# Altium PCB PCB1.PcbDoc
Units mil, origin at the board's own origin, x right, y up, seen from the top; angles counter-clockwise.
Board outline 5130 x 2720 mil, 2 copper layers (Top Layer, Bottom Layer); 35 components, 31 nets, 144 pads, 0 vias.
Unrouted connection lines stored in the file: 11.
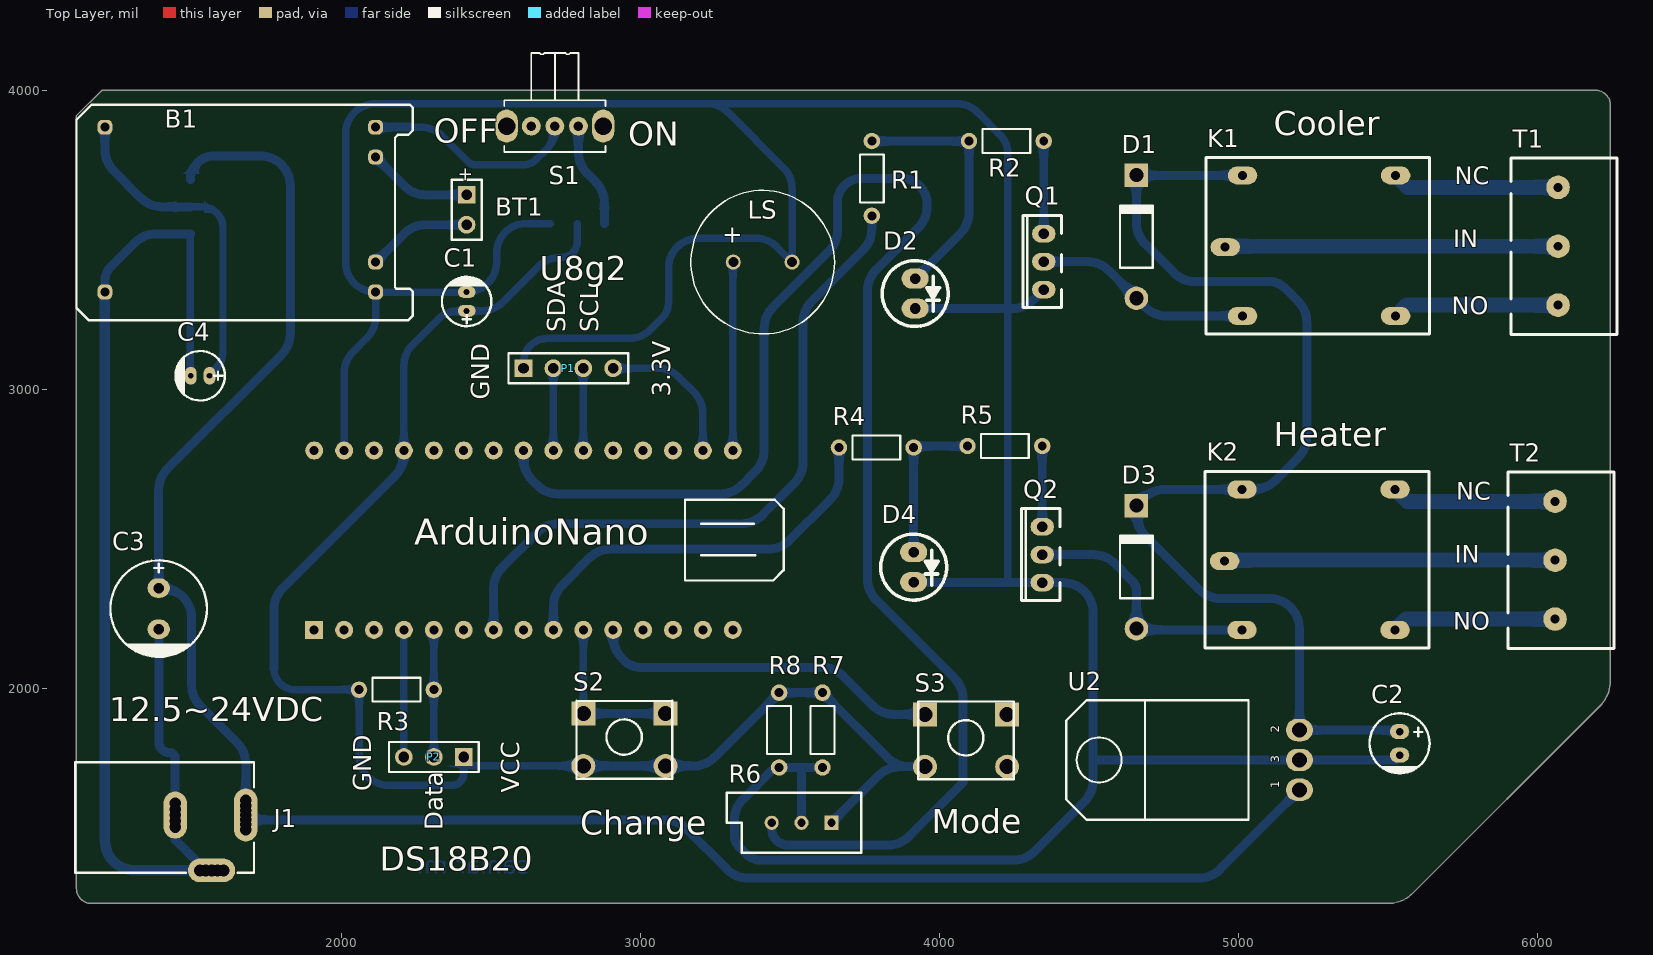
[diagram p0: Top Layer view]
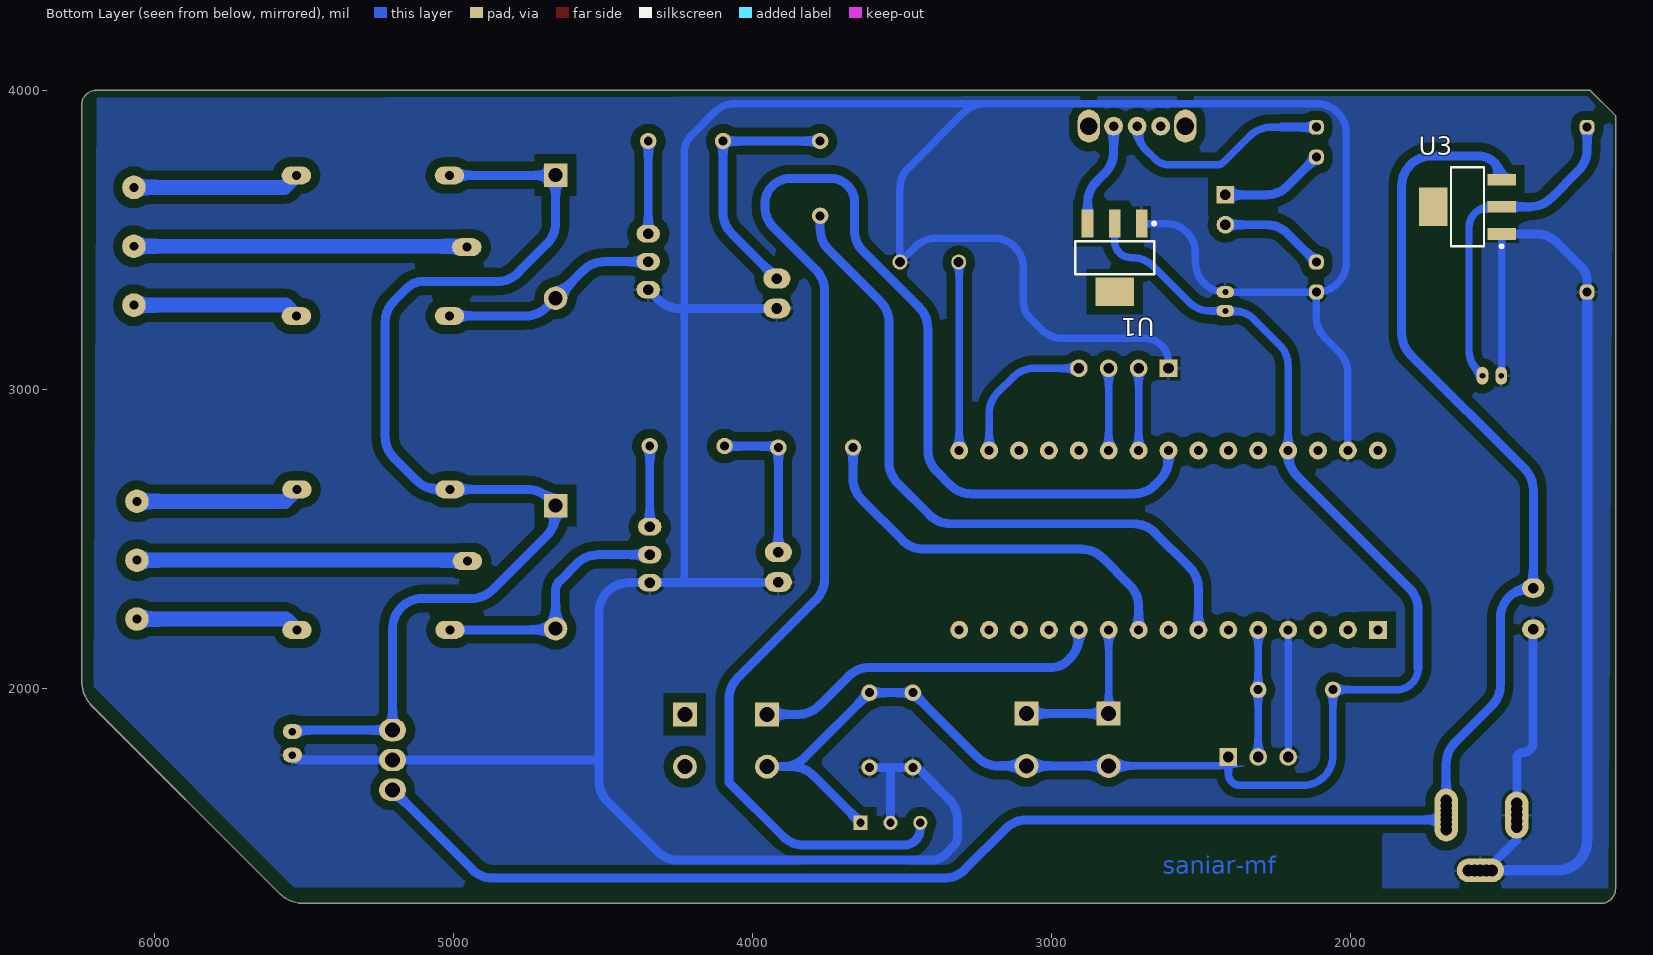
[diagram p1: Bottom Layer view, seen from below]

## Layer stack, top to bottom
Top Solder: solder mask 0.4, Solder Resist, Dk 3.5
Top Layer: signal copper 1.4
Dielectric 1: dielectric 12.6, FR-4, Dk 4.8
Bottom Layer: signal copper 1.4
Bottom Solder: solder mask 0.4, Solder Resist, Dk 3.5

## Board outline
1165,1280 cw(c1165,1330) 1115,1330 1115,3915 1200,4000 6195,4000 cw(c6195,3950) 6245,3950 6245,2025 cw(c6124.29,2025) 6209.64,1939.64 5585.36,1315.36 cw(c5500,1400.71) 5500,1280

## Design rules (kind name [scope] priority, off if disabled: settings)
Clearance Clearance_1 [InNamedPolygon('GND_L02_P025')] p1: gap=30 ignorepadtopadclearanceinfootprint=FALSE
Clearance [All] p2: gap=20 ignorepadtopadclearanceinfootprint=FALSE
DiffPairsRouting [All] p1: maxlimit=100 minlimit=30 mostfreqgap=10 toplayer_minwidth=15 toplayer_maxwidth=50 toplayer_prefwidth=15 bottomlayer_minwidth=15 bottomlayer_maxwidth=50 bottomlayer_prefwidth=15 maxuncoupledlength=500
PasteMaskExpansion [All] p1: expansion=1
PlaneClearance [All] p1: clearance=100
PlaneConnect [All] p1: planeconnectstyle=Relief reliefexpansion=20 reliefentries=4 reliefconductorwidth=10 reliefairgap=150
PolygonConnect [All] p1: connectstyle=Relief reliefconductorwidth=10 reliefentries=4 polygonreliefangle="90 Angle" airgapwidth=10
RoutingCorners [All] p1: cornerstyle=45-Degree minsetback=10 maxsetback=100
RoutingVias [All] p1: holewidth=28 width=50 viastyle="Through Hole" minholewidth=4 minwidth=8 maxholewidth=100 maxwidth=200
SMDToCorner [All] p1: distance=0
SMDToPlane [All] p1: distance=0
SolderMaskExpansion [All] p1: expansion=5
UnConnectedPin [All] p1:
UnRoutedNet [All] p1: checkbadconnections=TRUE
UnpouredPolygon [All] p1: allowunpoured=TRUE allowshelved=TRUE
Width [All] p1: maxlimit=100 minlimit=4 preferedwidth=10
23 further rules are at their usual default settings.

## Classes and differential pairs
polygon class PolygonClass_1: "Top Layer-gnd"
component class chematic: B1 BT1 C1 C2 C3 C4 D1 D2 D3 D4 J1 K1 K2 LS P1 P2 Q1 Q2 R1 R2 R3 R4 R5 R6 R7 R8 S1 S2 S3 T1 T2 U1 U3

## Components (designator, comment, footprint, x,y, rotation, side; value= is the part's Value field where it differs from the comment)
ArduinoNano "arduinoNano" "My Arduino nano" 1750,2135 r0 top (schematic designator "Arduino Nano")
B1 "TP4056" TP4056 1210,3876.18 r0 top
BT1 "Battery" BAT-2 2420,3600 r270 top
C1 "10uf" "cap 00" 2420,3293.5 r270 top value=10uF
C2 "47uf" "cap 01" 5540,1815.63 r90 top value=47uF
C3 "220uf" "cap 03" 1390,2266.1 r90 top value=220uF
C4 "22uf" "cap 00" 1528.5,3045 r0 top value=22uF
D1 "Diode 1N4007" DO-41 4660,3510 r90 top
D2 "CoLED" LED_5MM 3920,3370 r90 top
D3 "Diode 1N4007" DO-41 4660,2405 r90 top
D4 "CoLED" LED_5MM 3915,2455 r90 top
J1 "Power Jack" "Power Jack" 1110.35,1575.63 r0 top
K1 "Relay-12vDC" Relays 4891.89,3775 r270 top
K2 "Relay-12vDC" Relays 4890,2725 r270 top
LS "Buzzer" XDCR_PS1240P02BT 3410,3425 r0 top
P1 "LCD" HDR1X4 2610,3070 r0 top
P2 "DS18B20" HDR1X3 2410,1770 r180 top
Q1 "BD139" SOT-32 4409.06,3273.94 r90 top
Q2 "BD139" SOT-32 4404.06,2293.94 r90 top
R1 "180R" Res-(1/4) 3775,3705 r90 top value=180
R2 "1K" Res-(1/4) 4225,3830 r0 top
R3 "4.7K" Res-(1/4) 2185,1995 r0 top
R4 "180R" Res-(1/4) 3790,2805 r0 top value=180
R5 "1K" Res-(1/4) 4220,2810 r0 top
R6 "RPot" VR5 3540,1550 r180 top value=1K
R7 "10K" Res-(1/4) 3610,1860 r270 top
R8 "10K" Res-(1/4) 3465,1860 r270 top
S1 "Switch SPDT_Subminiator" "SPDT Subminiator" 2715,3880 r0 top
S2 "Change" "Switch - Push to On" 2947.5,1827.5 r0 top
S3 "Mode" "Switch - Push to On" 4090,1825 r0 top
T1 "Terminal" "Terminal 1*3" 5912.52,3773.43 r270 top
T2 "Terminal" "Terminal 1*3" 5902.52,2723.43 r270 top
U1 "LM1117IMP-3.3" MP04A_N 2790,3440 r270 bottom
U2 "L7812CV" "78XXCV - Right" 5205,1760 r90 top
U3 "LM1117IMP-5.0" MP04A_N 1610,3610 r0 bottom

## Footprints (in the part's own frame and the unit in brackets; to place one, negate y for a bottom-side part, rotate by r counter-clockwise, add the part's x,y. Pads: shape width x height; smd on the part's side, far side on the other; paste and mask are expansions set on the pad)
"78XXCV - Right" [mil] "Right Angle"
  oval 75x90 hole 50: 1(-100,0) 2(100,0) 3(0,0)
  silkscreen extent -201,170 200,780, body extent -198,-8 202,776, height 175
BAT-2 [mm] "Battery; 2 Leads"
  rect 1.5x1.5 hole 0.9: 1(-1.27,0)
  round 1.5 hole 0.9: 2(1.27,0)
  silkscreen extent -2.54,-1.27 2.54,1.27
"cap 00" [mm]
  oval 1x1.5 hole 0.5: 1(0.8,0) 2(-0.8,0)
  silkscreen extent -2.1,-2.1 2.1,2.1
"cap 01" [mil]
  oval 50x65 hole 25: 1(39.37,0) 2(-39.37,0)
  silkscreen extent -100,-100 100,100, body extent -99,-99 99,99, height 494
"cap 03" [mil]
  oval 65x75 hole 35: 1(68.9,0) 2(-68.9,0)
  silkscreen extent -161,-161 161,161, body extent -159,-159 157,158, height 473
DO-41 [mm] "Diode, Axial; Body 5.2 x 2.7 mm (LxDia. max), Lead Dia. 0.86 mm (max)"
  round 2 hole 1.2: 1(-5.23,0)
  rect 2x2 hole 1.2: 2(5.23,0)
  silkscreen extent -2.65,-1.4 2.75,1.4
HDR1X3 [mm] "Connector; Header; 3 Position"
  rect 1.5x1.5 hole 0.9: 1(0,0)
  round 1.5 hole 0.9: 2(2.54,0) 3(5.08,0)
  silkscreen extent -1.27,-1.27 6.35,1.27
HDR1X4 [mm] "Connector; Header; 4 Position"
  rect 1.5x1.5 hole 0.9: 1(0,0)
  round 1.5 hole 0.9: 2(2.54,0) 3(5.08,0) 4(7.62,0)
  silkscreen extent -1.27,-1.27 8.89,1.27
LED_5MM [mm]
  oval 1.7x2.3 hole 0.9: 1(0,0) 2(-2.54,0)
  silkscreen extent -4.07,-2.8 1.53,2.8
MP04A_N [mm] "SOT223, 4-Leads, Body 6.5x3.5mm, Pitch 2.3mm, Lead Span 7mm, IPC Medium Density"
  rect 2.4x1 smd: 1(-2.9,2.3) 2(-2.9,0) 3(-2.9,-2.3)
  rect 2.4x3.3 smd: 4(2.9,0)
  silkscreen extent -3.02,-3.35 1.4,3.47, body extent -3.49,-3.24 3.49,3.24, height 1.64
"My Arduino nano" [mil] "arduino nano"
  rect 60x60 hole 30: 0(160,60)
  round 60 hole 30: 1(260,60) 2(360,60) 3(460,60) 4(560,60) 5(660,60) 6(760,60) 7(860,60) 8(960,60) 9(1060,60) 10(1160,60) 11(1260,60) 12(1360,60) 13(1460,60) 14(1560,60) 15(1560,660) 16(1460,660) 17(1360,660) 18(1260,660) 19(1160,660) 20(1060,660) 21(960,660) 22(860,660) 23(760,660) 24(660,660) 25(560,660) 26(460,660) 27(360,660) 28(260,660) 29(160,660)
"Power Jack" [mm] "Power Adaptor Jack"
  round 1.5 hole 1: 1(14.5,-1.25) 1(14.5,-0.8) 1(14.5,-0.4) 1(14.5,0.4) 1(14.5,0.8) 1(14.5,1.25) 2(8.5,-1) 2(8.5,1) 2(8.5,-0.5) 2(8.5,0.5) 3(10.6,-4.7) 3(11.1,-4.7) 3(12.1,-4.7) 3(12.6,-4.7)
  oval 2x4.5 hole 1: 1(14.5,0)
  oval 2x4 hole 1: 2(8.5,0)
  oval 4x2 hole 1: 3(11.6,-4.7)
  round 1.9 on Top Overlay: MH(4,0)
  silkscreen extent 0,-4.9 15.2,4.5, body extent 0,-4.9 15.2,4.5, height 11
Relays [mil]
  oval 60x98.43 hole 30: 1(300,65) 2(60,635) 3(530,635) 4(60,123.11) 5(530,123.11)
  silkscreen extent 0,0 591,748
Res-(1/4) [mil]
  round 55 hole 30: 1(-125,0) 2(125,0)
  silkscreen extent -80,-40 80,40, body extent -135,-36 135,36, height 115
SOT-32 [mm]
  oval 1.5x2 hole 0.9: B(6.25,1.5) C(3.875,1.5) E(1.5,1.5)
  silkscreen extent 0,0 7.8,3.25
"SPDT Subminiator" [mm] "Subminiator SPDT switch"
  round 1.6 hole 0.8: 1(2,0) 2(0,0) 3(-2,0)
  oval 1.9x2.8 hole 1.5: M2(-4.1,0) M2(4.1,0)
  silkscreen extent -4.3,-2.2 4.3,6.2, body extent -4.31,-2.28 4.3,6.09, height 4.7
"Switch - Push to On" [mil]
  rect 80x80 hole 50: 1(-137.5,87.5) 1(137.5,87.5)
  round 80 hole 50: 2(-137.5,-87.5) 2(137.5,-87.5)
  silkscreen extent -160,-130 160,130, body extent -155,-121 157,123, height 205
"Terminal 1*3" [mm]
  round 2 hole 0.762: 1(2.5,4) 2(7.5,4) 3(12.5,4)
  silkscreen extent 0,0 15,9
TP4056 [mm]
  rrect70% 1.27x1.27 hole 0.762 mask+0.2: 1(0,0) 2(0,-14) 3(23,0) 4(23,-2.54) 5(23,-11.46) 6(23,-14)
  silkscreen extent -2.41,-16.38 26.16,1.91
VR5 [mm] "Thru-Hole; 3 Leads"
  rect 1.2x1.2 hole 0.7: 1(-2.54,0)
  round 1.2 hole 0.7: 2(0,0) 3(2.54,0)
  silkscreen extent -5.08,-2.54 6.35,2.54
XDCR_PS1240P02BT [mm]
  round 1.28 hole 0.85: 1(-2.5,0) 2(2.5,0)
  silkscreen extent -6.1,-6.1 6.1,6.1

## Part data
B1: "li ion charger board"
BT1: "Multicell Battery", LatestRevisionDate=17-Jul-2002, LatestRevisionNote="Re-released for DXP Platform.", PackageDescription="Battery; 2 Leads", PackageReference=BAT-2, Published=24-Mar-1999, Publisher="Altium Limited"
C1 C2 C4: library part Cap-Polar, "Polar Capacitor", Voltage=16V, Adding Date=1387/12/20, Designer="Saeid Jorablo", Organazation=ControTec
C3: library part Cap-Polar, "Polar Capacitor", Voltage=25V, Adding Date=1387/12/20, Designer="Saeid Jorablo", Organazation=ControTec
D1 D3: "1 Amp General Purpose Rectifier", Code_JEDEC=DO-204-AL, ComponentLink1Description="Manufacturer Link", ComponentLink1URL=http://www.fairchildsemi.com/, ComponentLink2Description=Datasheet, ComponentLink2URL=http://www.fairchildsemi.com/ds/1N%2F1N4001.pdf, DatasheetVersion=1998, LatestRevisionDate=17-Jul-2002, LatestRevisionNote="Re-released for DXP Platform.", PackageDescription="Diode, Axial; Body 5.2 x 2.7 mm (LxDia. max), Lead Dia. 0.86 mm (max)", PackageReference=DO-41, PackageVersion=Aug-1999, Published=8-Jun-2000, Publisher="Altium Limited"
D2 D4: library part LED, "Blue LED for Cooler"
K1: library part Relay-05vDC, "Cooler Relay", ComponentLinkURL=www.picpars.com, Designer="Seyed Mohsen Ghasemain"
K2: library part Relay-05vDC, "Heater Relay", ComponentLinkURL=www.picpars.com, Designer="Seyed Mohsen Ghasemain"
LS: library part PS1240P02BT, "Buzzers Transducer, Externally Driven Piezo 3V 4kHz 60dB @ 3V, 10cm Through Hole PC Pins", Package="2020 TDK", Availability=Unavailable, MF=TDK, MP=PS1240P02BT, Price=None, SnapEDA_Link=https://www.snapeda.com/parts/PS1240P02BT/TDK/view-part/53420/?ref=snap
P1: library part "Header 4", "I2C Oled", LatestRevisionDate=17-Jul-2002, LatestRevisionNote="Re-released for DXP Platform.", Publisher="Altium Limited"
P2: library part "Header 3", "Header, 3-Pin", LatestRevisionDate=17-Jul-2002, LatestRevisionNote="Re-released for DXP Platform.", Publisher="Altium Limited"
Q1 Q2: "NPN Transistor", De="Seyed Mohsen Ghasemian", E-mail=picpars@gmail.com, web=www.picpars.com
R1 R2 R3 R4 R5 R7 R8: library part Resistor, "Resistor", Power="1/8 W", Tolerance=5%
R6: "Potentiometer", LatestRevisionDate=17-Jul-2002, LatestRevisionNote="Re-released for DXP Platform.", PackageDescription="Variable Resistor, Thru-Hole; 3 Leads", PackageReference=VR5, Published=8-Jun-2000, Publisher="Altium Limited", Set Position=0.5, Sim Note="Enter the Resistance value and the set point into parameter fields."
S1: "Subminiator SPDT Switch", Company=E.P.I.L, Design date=2011/11/02
S2 S3: library part "Switch PB", "Push Button Switch"
T1: library part "Terminal 1*3", "Cooler Terminal", ComponentLinkURL=www.picpars.com, Designer="Seyed Mohsen Ghasemain", E-mail=picpars@gmail.com
T2: library part "Terminal 1*3", "Heater Terminal", ComponentLinkURL=www.picpars.com, Designer="Seyed Mohsen Ghasemain", E-mail=picpars@gmail.com
U1: library part LM1117IMP-x.x, "x.x Volt, 800mA Low-Dropout Linear Regulator, 4-pin SOT-223", Manufacturer="National Semiconductor", PackageTopMarking=XYTT*N05B, PowerWise=N, Supplier Part Number 1=7614123, Code_IPC=SOT223-4, Code_JEDEC=TO-261-AA, ComponentLink1Description="LM1117 Datasheet", ComponentLink1URL=http://www.national.com/ds/LM/LM1117.pdf, ComponentLink2Description="LM1117 Web Page", ComponentLink2URL=http://www.national.com/pf/LM/LM1117.html, ComponentLink3Description="MP04A Package Page", ComponentLink3URL=http://www.national.com/packaging/folders/mp04a.html, CompType="LDO IC", DatasheetVersion=Apr-2006, PackageDescription="Molded SOT-223, 6.50 x 3.56 x 1.6mm Body, 4 Lead, 2.3mm Pitch", PackageReference=MP04A, PackageVersion="revB, Apr-2003", PartNumber=LM1117IMP-3.3, PinCount=4, Published=4-Dec-2008, Publisher="Altium Limited", RoHS=N, Supplier 1=Farnell
U2: library part L78XXCV, "Fixed Voltage Regulator", Voltage=12, Adding Date=1387/01/06, Company=ControTec, Designer="Saeid Jorablo"
U3: library part LM1117IMP-x.x, "x.x Volt, 800mA Low-Dropout Linear Regulator, 4-pin SOT-223", Manufacturer="National Semiconductor", PackageTopMarking=XYTT*N05B, PartNumber=LM1117IMP-3.3, PowerWise=N, Supplier Part Number 1=7614123, Code_IPC=SOT223-4, Code_JEDEC=TO-261-AA, ComponentLink1Description="LM1117 Datasheet", ComponentLink1URL=http://www.national.com/ds/LM/LM1117.pdf, ComponentLink2Description="LM1117 Web Page", ComponentLink2URL=http://www.national.com/pf/LM/LM1117.html, ComponentLink3Description="MP04A Package Page", ComponentLink3URL=http://www.national.com/packaging/folders/mp04a.html, CompType="LDO IC", DatasheetVersion=Apr-2006, PackageDescription="Molded SOT-223, 6.50 x 3.56 x 1.6mm Body, 4 Lead, 2.3mm Pitch", PackageReference=MP04A, PackageVersion="revB, Apr-2003", PinCount=4, Published=4-Dec-2008, Publisher="Altium Limited", RoHS=N, Supplier 1=Farnell
J1: Adding Date=10/21/2009, Company=Personal, Designer="Saeid Jorablo", Project Name=Laser

## Nets (pads, with @x,y where several pads share a name; then routed paths per layer and width w, separated by ;. In a path a pad name is that pad's centre, name@x,y a point inside that pad or via, vN(x,y) a via of type N, cw(c..) or ccw(c..) an arc to the next point about the centre after c; other vN are vias at no path point)
+5: B1.1 C4.1 U3.2 | length 1114
  Bottom Layer w25: U3.2 1535,3610 cw(c1535,3540) 1605,3540 1605,3131.42 cw(c1505,3131.42) 1575.71,3060.71 C4.1
  Bottom Layer w30: B1.1 1210,3801.42 ccw(c1310,3801.42) 1239.29,3730.71 1330.71,3639.29 ccw(c1401.42,3710) 1401.42,3610 U3.2
+12: C2.1 D1.2 D3.2 K1.4 K2.4 U2.2 | length 3755.9
  Bottom Layer w30: K1.4 4660.91,3715 D1.2 4660,3556.42 ccw(c4760,3556.42) 4689.29,3485.71 4785.71,3389.29 ccw(c4856.42,3460) 4856.42,3360 5105,3360 cw(c5105,3287.57) 5156.21,3338.79 5200.71,3294.29 cw(c5130,3223.58) 5230,3223.58 5230,2841.42 cw(c5130,2841.42) 5200.71,2770.71 5124.29,2694.29 cw(c5053.58,2765) 5053.58,2665 K2.4 4755.52,2665 ccw(c4755.52,2565) 4684.81,2635.71 D3.2 4660,2581.42 ccw(c4760,2581.42) 4689.29,2510.71 4870.71,2329.29 ccw(c4941.42,2400) 4941.42,2300 5105,2300 cw(c5105,2200) 5205,2200 U2.2 5535,1860 cw(c5535,1855) C2.1
Cooler: ArduinoNano.6 R1.1 | length 2290.3
  Bottom Layer w30: ArduinoNano.6 2510,2333.58 cw(c2610,2333.58) 2539.29,2404.29 2655.71,2520.71 cw(c2726.42,2450) 2726.42,2550 3338.58,2550 ccw(c3338.58,2650) 3409.29,2579.29 3515.71,2685.71 ccw(c3445,2756.42) 3545,2756.42 3545,3223.58 cw(c3645,3223.58) 3574.29,3294.29 3745.71,3465.71 ccw(c3675,3536.42) 3775,3536.42 R1.1
GND: ArduinoNano.3 ArduinoNano.28 B1.2 B1.6 C1.2 C2.2 C3.2 C4.2 D2.2 D4.2 J1.2 J1.3 LS.2 P1.1 P2.3 Q1.E Q2.E R6.2 R7.2 R8.2 U1.1 U2.3 U3.1 | length 16751.4
  Bottom Layer w25: U3.1 1495.83,3075 ; J1.3@1527.68,1390.59 1547.36,1390.59 1567.05,1390.59 J1.3@1586.73,1390.59 ; ArduinoNano.28 2010,3053.58 cw(c2110,3053.58) 2039.29,3124.29 2086.22,3171.22 ccw(c2015.51,3241.93) 2115.51,3241.93 B1.6 ; P2.3 ArduinoNano.3 ; P1.1 2610,3090 cw(c2690,3090) 2690,3170 2963.58,3170 ccw(c2963.58,3270) 3034.29,3199.29 3073.79,3238.79 ccw(c3022.57,3290) 3095,3290 3095,3405 cw(c3195,3405) 3195,3505 3387,3505 cw(c3387,3405) 3457.71,3475.71 LS.2 3508.43,3670.15 ccw(c3408.43,3670.15) 3479.14,3740.86 3294.29,3925.71 ccw(c3223.58,3855) 3223.58,3955 ; U1.1 2619.17,3554.17 ccw(c2619.17,3455) 2520,3455 2520,3425 cw(c2420,3425) C1.2 B1.6 ; 4235,2352.99 cw(c4247.07,2365.06) 4230,2365.06 4230,3270 4230,3789.64 ccw(c4144.64,3789.64) 4205,3850 4129.29,3925.71 ccw(c4058.58,3855) 4058.58,3955 3223.58,3955 ; 1495.83,3075 cw(c1492.98,3072.15) 1497.01,3072.15 C4.2 cw(c1499.86,3047.85) 1495.83,3047.85 1495.83,3075 ; B1.6 2115,3325 cw(c2115,3425) 2015,3425 2015,3855 cw(c2115,3855) 2115,3955 3223.58,3955
  Bottom Layer w30: B1.2 1210,3361.72 cw(c1278.28,3361.72) 1230,3410 1310.16,3490.16 cw(c1380.87,3419.45) 1380.87,3519.45 U3.1 ; C3.2@1391.1,2197.2 1391.1,1818.9 ccw(c1425,1818.9) 1425,1785 cw(c1425,1765) 1445,1765 1445,1595.31 1445,1555.94 1445,1492.95 J1.3@1547.36,1390.59 ; J1.3@1586.73,1390.59 J1.3@1606.42,1390.59 ; R6.2 3540,1728.96 ccw(c3531.46,1728.96) 3537.5,1735 ; R7.2 3537.5,1735 ; D4.2 ccw(c3919.85,2359.85) 3919.85,2352.99 4235,2352.99 Q2.E 4415,2352.99 cw(c4415,2252.99) 4515,2252.99 4515,1760 ; D2.2 4230,3270 4245.59,3270 ccw(c4245.59,3370) 4316.3,3299.29 Q1.E ; C2.2 cw(c5523.74,1776.26) 5523.74,1760 U2.3 4515,1760 ; 3537.5,1735 R8.2 ccw(c3465,1698.79) 3439.39,1724.39 3344.29,1629.29 ccw(c3415,1558.58) 3315,1558.58 3315,1510 ccw(c3375.36,1510) 3332.68,1467.32 3355,1445 ccw(c3403.28,1493.28) 3403.28,1425 4248.58,1425 ccw(c4248.58,1525) 4319.29,1454.29 4485.71,1620.71 ccw(c4415,1691.42) 4515,1691.42 4515,1760
  Bottom Layer w35: B1.2 1210,1490.59 ccw(c1310,1490.59) 1310,1390.59 J1.3@1527.68,1390.59
Heater: ArduinoNano.8 R4.1 | length 1345.7
  Bottom Layer w30: ArduinoNano.8 2710,2273.58 cw(c2810,2273.58) 2739.29,2344.29 2830.71,2435.71 cw(c2901.42,2365) 2901.42,2465 3428.58,2465 ccw(c3428.58,2565) 3499.29,2494.29 3635.71,2630.71 ccw(c3565,2701.42) 3665,2701.42 R4.1
Net*_4: ArduinoNano.4 P2.2 R3.2 | length 425
  Bottom Layer w25: P2.2 R3.2 ArduinoNano.4
Net*_9: ArduinoNano.9 S2.1 | length 555
  Bottom Layer w25: S2.1@2810,1915 ArduinoNano.9
  Bottom Layer w30: S2.1@2810,1915 S2.1@3085,1915
Net*_10: ArduinoNano.10 S3.1 | length 1181.7
  Bottom Layer w30: ArduinoNano.10 2910,2171.42 ccw(c3010,2171.42) 2939.29,2100.71 2950,2090 ccw(c2998.28,2138.28) 2998.28,2070 3608.58,2070 cw(c3608.58,1970) 3679.29,2040.71 3778.21,1941.79 ccw(c3848.92,2012.5) 3848.92,1912.5 S3.1@3952.5,1912.5
Net*_15: ArduinoNano.15 LS.1 | length 630.4
  Bottom Layer w25: ArduinoNano.15 3310,3421.2 cw(c3315.38,3421.2) LS.1
Net*_16: ArduinoNano.16 P1.4 | length 502
  Bottom Layer w25: P1.4 3058.58,3070 cw(c3058.58,2970) 3129.29,3040.71 3180.71,2989.29 cw(c3110,2918.58) 3210,2918.58 ArduinoNano.16
Net*_20: ArduinoNano.20 P1.3 | length 275
  Bottom Layer w25: ArduinoNano.20 P1.3
Net*_21: ArduinoNano.21 P1.2 | length 275
  Bottom Layer w25: ArduinoNano.21 P1.2
NetB1_3: B1.3 S1.2 | length 721.8
  Bottom Layer w25: 2230,3876.18 2267.4,3876.18 cw(c2267.4,3776.18) 2338.11,3846.89 2424.39,3760.61 ccw(c2450,3786.21) 2450,3750 2606.72,3750 ccw(c2606.72,3818.28) 2655,3770 2685.71,3800.71 ccw(c2615,3871.42) 2715,3871.42 S1.2
  Bottom Layer w30: B1.3 2230,3876.18
NetB1_4: B1.4 BT1.1 | length 352.5
  Bottom Layer w30: B1.4 2212.4,3679.29 ccw(c2283.11,3750) 2283.11,3650 BT1.1
NetB1_5: B1.5 BT1.2 | length 352
  Bottom Layer w30: B1.5 2211.22,3520.71 cw(c2281.93,3450) 2281.93,3550 BT1.2
NetC3_1: C3.1 J1.1 U2.1 U3.3 | length 6546.2
  Bottom Layer w30: U3.3 cw(c1575.28,3700.55) 1575.28,3780 1730,3780 cw(c1730,3680) 1830,3680 1830,3186.42 cw(c1730,3186.42) 1800.71,3115.71 1419.29,2734.29 ccw(c1490,2663.58) 1390,2663.58 C3.1 1400,2335 cw(c1400,2235) 1500,2235 1500,2011.42 ccw(c1600,2011.42) 1529.29,1940.71 1651.93,1818.07 cw(c1581.22,1747.36) 1681.22,1747.36 1681.22,1624.84 1681.22,1607.13 J1.1@1681.22,1591.38 ; J1.1@1681.22,1559.88 3083.7,1559.88 cw(c3083.7,1459.88) 3154.41,1530.59 3290.71,1394.29 ccw(c3361.42,1465) 3361.42,1365 4868.58,1365 ccw(c4868.58,1465) 4939.29,1394.29 U2.1
NetD1_1: D1.1 K1.5 Q1.C | length 731.6
  Bottom Layer w30: Q1.C 4496.18,3426.5 cw(c4496.18,3326.5) 4566.89,3397.21 D1.1 4689.81,3274.29 ccw(c4760.52,3345) 4760.52,3245 K1.5
NetD2_1: D2.1 R1.2 R2.1 | length 855.3
  Bottom Layer w30: R1.2 R2.1 4100,3591.42 cw(c4000,3591.42) 4070.71,3520.71 D2.1
NetD3_1: D3.1 K2.5 Q2.C | length 850.7
  Bottom Layer w30: Q2.C 4517.08,2446.5 cw(c4517.08,2346.5) 4587.79,2417.21 4645,2360 cw(c4608.79,2323.79) 4660,2323.79 D3.1 ccw(c4669.89,2208.98) 4669.89,2195 K2.5
NetD4_1: D4.1 R4.2 R5.1 | length 535
  Bottom Layer w30: D4.1 3915,2810 R5.1
NetK1_1: K1.1 T1.2 | length 1114.4
  Bottom Layer w50: K1.1 4960.04,3478.15 T1.2
NetK1_2: K1.2 T1.1 | length 559.7
  Bottom Layer w50: K1.2 5566.89,3675 T1.1
NetK1_3: K1.3 T1.3 | length 558.1
  Bottom Layer w50: K1.3 5563.19,3281.3 T1.3
NetK2_1: K2.1 T2.2 | length 1106.3
  Bottom Layer w50: K2.1 4958.15,2428.15 T2.2
NetK2_2: K2.2 T2.1 | length 551.6
  Bottom Layer w50: K2.2 5565,2625 T2.1
NetK2_3: K2.3 T2.3 | length 550
  Bottom Layer w50: K2.3 5561.3,2231.3 T2.3
NetQ1_B: Q1.B R2.2 | length 310
  Bottom Layer w30: Q1.B R2.2
NetQ2_B: Q2.B R5.2 | length 270
  Bottom Layer w30: Q2.B R5.2
NetS1_1: S1.1 U1.3 | length 353.2
  Bottom Layer w30: S1.1 2793.74,3792.68 ccw(c2893.74,3792.68) 2823.03,3721.97 2851.26,3693.74 cw(c2780.55,3623.03) 2880.55,3623.03 U1.3
PotNet: ArduinoNano.22 R6.3 | length 5196.7
  Bottom Layer w30: ArduinoNano.22 2610,2766.42 ccw(c2710,2766.42) 2639.29,2695.71 2655.71,2679.29 ccw(c2726.42,2750) 2726.42,2650 3268.58,2650 ccw(c3268.58,2750) 3339.29,2679.29 3385.71,2725.71 ccw(c3315,2796.42) 3415,2796.42 3415,3203.58 cw(c3515,3203.58) 3444.29,3274.29 3630.71,3460.71 ccw(c3560,3531.42) 3660,3531.42 3660,3625 cw(c3740,3625) 3740,3705 3875,3705 cw(c3875,3620) 3960,3620 3960,3611.42 cw(c3860,3611.42) 3930.71,3540.71 3789.29,3399.29 ccw(c3860,3328.58) 3760,3328.58 3760,2366.42 ccw(c3860,2366.42) 3789.29,2295.71 4050.71,2034.29 cw(c3980,1963.58) 4080,1963.58 4080,1685 3899.29,1504.29 cw(c3828.58,1575) 3828.58,1475 3495,1475 cw(c3495,1530) 3440,1530 R6.3
VCC: ArduinoNano.26 C1.1 P2.1 R3.1 R6.1 R7.1 R8.1 S2.2 S3.2 U1.2 | length 5129
  Bottom Layer w25: 1775,2066.42 ccw(c1846.42,2066.42) 1846.42,1995 R3.1 2060,1775 ccw(c2160,1775) 2160,1675 2370,1675 ccw(c2370,1715) 2410,1715 P2.1 ccw(c2440,1770) 2440,1740 S2.2@2810,1740 ; ArduinoNano.26 2210,3078.58 cw(c2310,3078.58) 2239.29,3149.29 2322.72,3232.72 cw(c2393.43,3162.01) 2393.43,3262.01 C1.1 2470.59,3262.01 ccw(c2470.59,3362.01) 2541.3,3291.3 2660.71,3410.71 cw(c2731.42,3340) 2731.42,3440 2735,3440 ccw(c2735,3495) 2790,3495 U1.2
  Bottom Layer w30: 1775,2066.42 1775,2263.58 cw(c1875,2263.58) 1804.29,2334.29 2180.71,2710.71 ccw(c2110,2781.42) 2210,2781.42 ArduinoNano.26 ; S2.2@2810,1740 3085,1740 3178.58,1740 ccw(c3178.58,1840) 3249.29,1769.29 R8.1 R7.1 3828.21,1766.79 ccw(c3898.92,1837.5) 3898.92,1737.5 ; R6.1 3798.21,1708.21 cw(c3868.92,1637.5) 3868.92,1737.5 3898.92,1737.5 ; S3.2@3952.5,1737.5 3898.92,1737.5
pads on no net: ArduinoNano.0 ArduinoNano.1 ArduinoNano.2 ArduinoNano.5 ArduinoNano.7 ArduinoNano.11 ArduinoNano.12 ArduinoNano.13 ArduinoNano.14 ArduinoNano.17 ArduinoNano.18 ArduinoNano.19 ArduinoNano.23 ArduinoNano.24 ArduinoNano.25 ArduinoNano.27 ArduinoNano.29 J1.MH S1.3 S1.M2 U1.4 U3.4

## Polygon pours and split planes (outlines as drawn)
GND on Bottom Layer "GND_L02_P025" (solid, remove dead copper, pour order 25): 1125,3885 1210,3980 3300,3980 6195,3975 6205,2005 5535,1335 1140,1330

## Other copper
Bottom Layer:
  text "saniar-mf" at 2630,1360 h100

## Silkscreen, mask and mechanical layers (free items; w line width, h text height)
Top Overlay:
  lines w7.87: 3205,2445 3385,2445 ; 3205,2550 3380,2550 ; 3150,2360 3150,2630 3450,2630 3480,2600 3480,2395 3445,2360 3150,2360
  text "Cooler" at 5120,3850 h80
  text "OFF" at 2310,3825 h80
  text "ON" at 2960,3815 h80
  text "NC" at 5725,3665 h100
  text "+" at 3275,3490 h60
  text "IN" at 5720,3455 h100
  text "U8g2" at 2665,3365 h80
  text "NO" at 5715,3230 h100
  text "SDA" at 2750,3190 h60 r90
  text "SCL" at 2860,3190 h60 r90
  text "3.3V" at 3100,2975 h60 r90
  text "GND" at 2495,2965 h60 r90
  text "Heater" at 5120,2810 h80
  text "NC" at 5730,2610 h100
  text "IN" at 5725,2400 h100
  text "NO" at 5720,2175 h100
  text "12.5~24VDC" at 1225,1890 h80
  text "GND" at 2100,1655 h60 r90
  text "VCC" at 2595,1650 h60 r90
  text "Data" at 2340,1525 h60 r90
  text "Mode" at 3975,1515 h80
  text "Change" at 2800,1510 h80
  text "DS18B20" at 2130,1390 h80
Drill Drawing:
  lines w20: 1115,1330 ccw(c1165,1330) 1165,1280 5500,1280 ccw(c5500,1400.71) 5585.36,1315.36 6209.64,1939.64 ccw(c6124.29,2025) 6245,2025 6245,3950 ccw(c6195,3950) 6195,4000 1200,4000 1115,3915 1115,3695 1115,1330

## Text inside footprints (layer, text, board x,y; h text height)
BT1: Top Overlay "+" at 2397.28,3744.49 h45.28 r270
U2: Top Overlay "1" at 5138.07,1665 h27.56 r90; Top Overlay "2" at 5138.07,1851 h27.56 r90; Top Overlay "3" at 5138.07,1750 h27.56 r90